# Altium PCB MAGI's24L01.PcbDoc
Units mil, origin at the board's own origin, x right, y up, seen from the top; angles counter-clockwise.
Board outline 6000 x 4000 mil, 2 copper layers (Top Layer, Bottom Layer); 22 components, 16 nets, 85 pads, 39 vias.
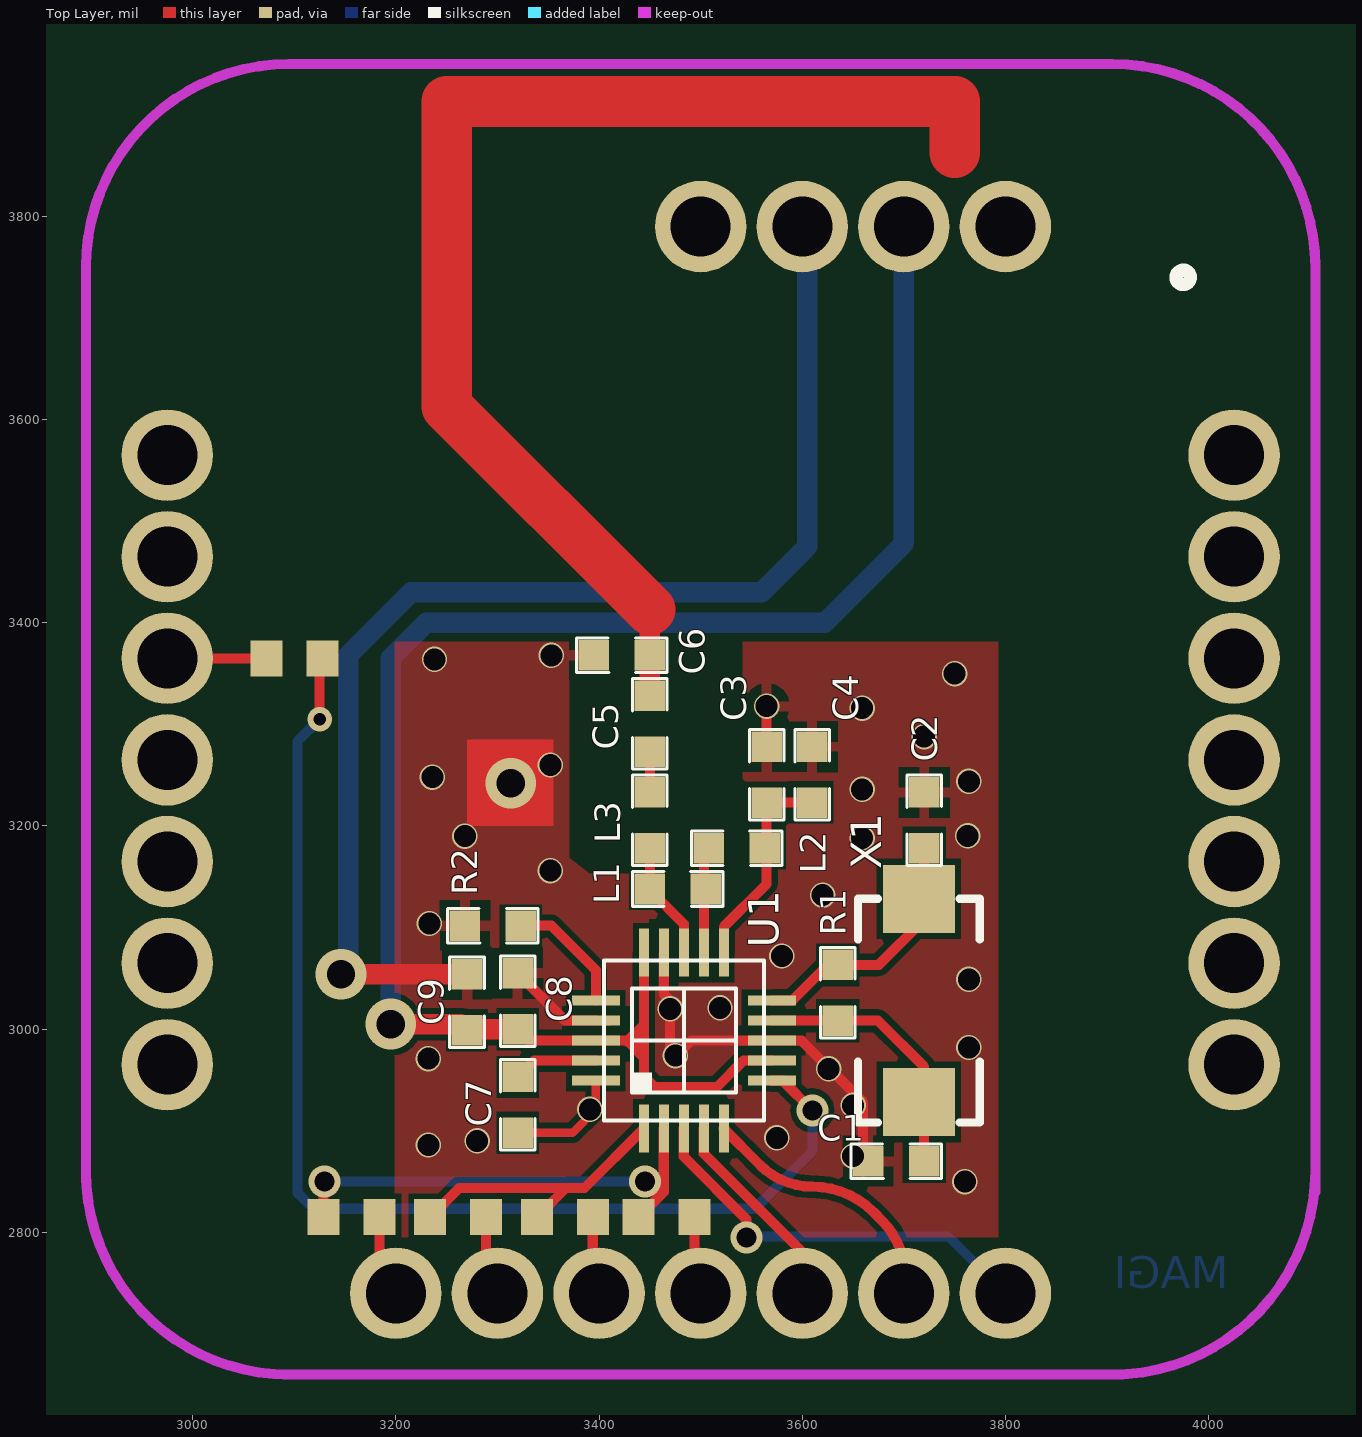
[diagram p0: Top Layer view]
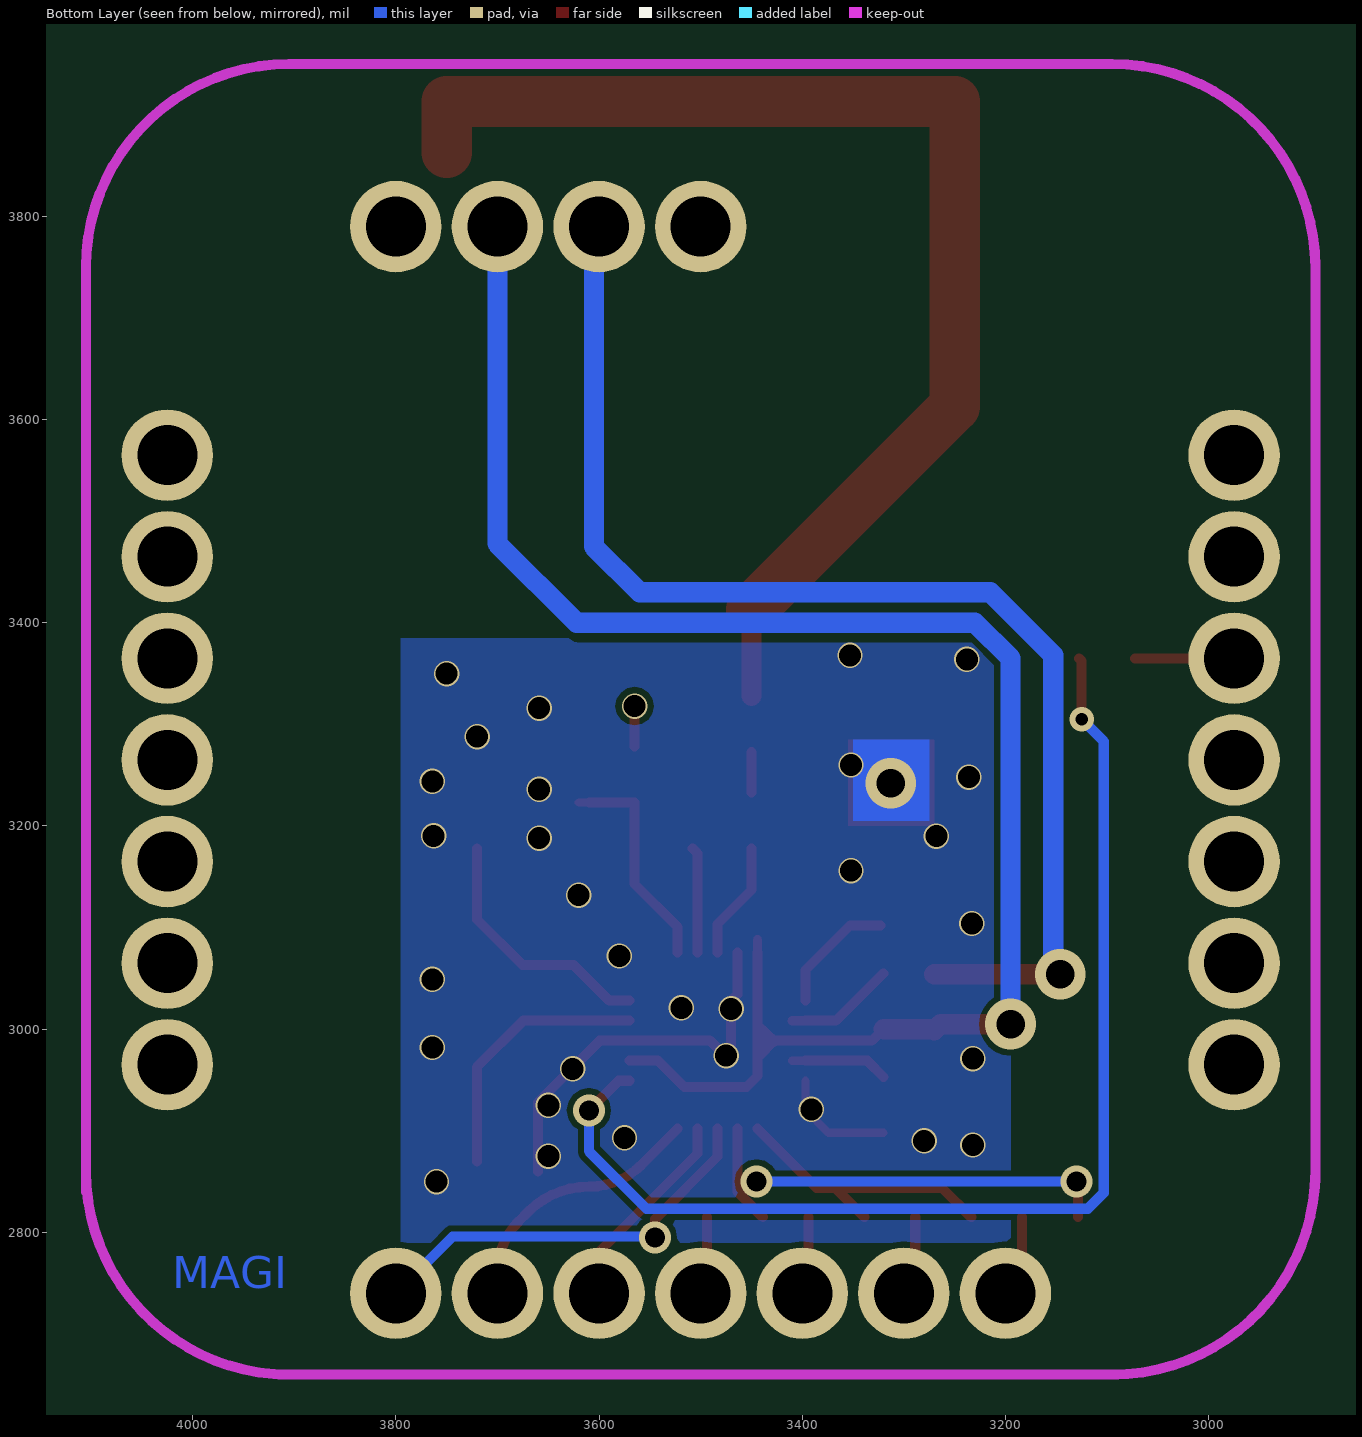
[diagram p1: Bottom Layer view, seen from below]

## Layer stack, top to bottom
Top Solder: solder mask 0.4, Solder Resist, Dk 3.5
Top Layer: signal copper 1.4
Dielectric 1: dielectric 12.6, FR-4, Dk 4.8
Bottom Layer: signal copper 1.4
Bottom Solder: solder mask 0.4, Solder Resist, Dk 3.5

## Board outline
1000,1000 7000,1000 7000,5000 1000,5000

## Design rules (kind name [scope] priority, off if disabled: settings)
Clearance [All] p1: gap=6
PolygonConnect [All] p1: connectstyle=Relief reliefconductorwidth=10 reliefentries=4 polygonreliefangle="90 Angle" airgapwidth=10
RoutingVias [All] p1: holewidth=280 width=500 viastyle="Through Hole" minholewidth=12 minwidth=24 maxholewidth=28 maxwidth=50
SolderMaskExpansion [All] p1: expansion=4
Width [All] p1: maxlimit=100 minlimit=6 preferedwidth=10
29 further rules are at their usual default settings.

## Components (designator, comment, footprint, x,y, rotation, side; value= is the part's Value field where it differs from the comment)
C1 "22pF" 0603 3720,2870 r180 top
C2 "22pF" 0603 3720,3178 r90 top
C3 "2.2nF" 0603 3565,3223 r90 top
C4 "4.7pF" 0603 3610,3223 r90 top
C5 "1.5pF" 0603 3450,3273 r90 top
C6 "1.5pF" 0603 3450,3368 r180 top
C7 "33nF" 0603 3320,2898 r90 top
C8 "1nF" 0603 3320,3000 r90 top
C9 "10nF" 0603 3270,2999 r90 top
L1 "6.8nH" 0603 3450,3138 r0 top
L2 "3.3nH" 0603 3508,3178 r0 top
L3 "3.9nH" 0603 3450,3178 r90 top
R1 "1M" 0603 3635,3008.32 r90 top
R2 "22K" 0603 3323,3102 r180 top
U1 "NRF24L01" nRF24l01 10482.13,-2070.11 r90 top
X1 "Comment" 16M_6532 3674.68,3008.32 r90 top
? "Comment" MAGI-M8 3500,3265 r0 top
? "Comment" 1608[0603] 3100,3365 r0 top
? "Comment" 1608[0603] 3156.3,2815 r0 top
? "Comment" 1608[0603] 3261.3,2815 r0 top
? "Comment" 1608[0603] 3366.3,2815 r0 top
? "Comment" 1608[0603] 3466.3,2815 r0 top

## Footprints (in the part's own frame and the unit in brackets; to place one, negate y for a bottom-side part, rotate by r counter-clockwise, add the part's x,y. Pads: shape width x height; smd on the part's side, far side on the other; paste and mask are expansions set on the pad)
16M_6532 [mil]
  rect 66.93x70.87 smd: 1(-80,-40) 2(120,-40)
  silkscreen extent -100,-100 120,20
0603 [mil]
  rect 30x30 smd: 1(0,0) 2(55,0)
  silkscreen extent -17,-17 72,17
1608[0603] [mm] "Chip Capacitor, Body 1.6x0.8mm, IPC High Density"
  rect 0.8x0.9 smd: 1(-0.7,0) 2(0.7,0)
  body extent -0.87,-0.48 0.87,0.48, height 1.3
MAGI-M8 [mil]
  round 90 hole 59.06: 1(300,525) 2(200,525) 3(100,525) 4(0,525) 8(-525,300) 9(-525,200) 10(-525,100) 11(-525,0) 12(-525,-100) 13(-525,-200) 14(-525,-300) 15(-300,-525) 16(-200,-525) 17(-100,-525) 18(0,-525) 19(100,-525) 20(200,-525) 21(300,-525) 22(525,-300) 23(525,-200) 24(525,-100) 25(525,0) 26(525,100) 27(525,200) 28(525,300)
  Keep-Out Layer lines w10: -605,-415 -605,290 -605,485 cw(c-405,485) -405,685 ; -605,-405 ccw(c-405,-405) -405,-605 ; -410,-605 415,-605 ; 405,-605 ccw(c405,-405) 605,-405 ; 405,685 cw(c405,485) 605,485 605,-425
  silkscreen extent 468,468 482,482
nRF24l01 [mm]
  rect 1.2x0.25 smd: 1(126.292,178.768) 2(126.292,178.268) 3(126.292,177.768) 4(126.292,177.268) 5(126.292,176.768) 11(130.692,176.768) 12(130.692,177.268) 13(130.692,177.768) 14(130.692,178.268) 15(130.692,178.768)
  rect 0.25x1.2 smd: 6(127.492,175.568) 7(127.992,175.568) 8(128.492,175.568) 9(128.992,175.568) 10(129.492,175.568) 16(129.492,179.968) 17(128.992,179.968) 18(128.492,179.968) 19(127.992,179.968) 20(127.492,179.968)
  silkscreen extent 126.49,175.77 130.49,179.77

## Via types
v1: diameter 25, hole 21.65, Top Layer to Bottom Layer, 31 vias
v2: diameter 31.5, hole 19.68, Top Layer to Bottom Layer, 4 vias
v3: diameter 50, hole 28, Top Layer to Bottom Layer, 3 vias
v4: diameter 24, hole 12, Top Layer to Bottom Layer, 1 vias

## Nets (pads, with @x,y where several pads share a name; then routed paths per layer and width w, separated by ;. In a path a pad name is that pad's centre, name@x,y a point inside that pad or via, vN(x,y) a via of type N, cw(c..) or ccw(c..) an arc to the next point about the centre after c; other vN are vias at no path point)
2: ?.1@3072.44,3365 ?.10 | length 97.4
  Top Layer w10: ?.10 ?.1@3072.44,3365
7: ?.2@3183.86,2815 ?.15 | length 81.7
  Top Layer w10: ?.2@3183.86,2815 3183.86,2756.14 ?.15
8: ?.2@3288.86,2815 ?.16 | length 79.6
  Top Layer w10: ?.2@3288.86,2815 3288.86,2751.14 ?.16
9: ?.2@3393.86,2815 ?.17 | length 77.5
  Top Layer w10: ?.2@3393.86,2815 3393.86,2746.14 ?.17
10: ?.2@3493.86,2815 ?.18 | length 77.5
  Top Layer w10: ?.2@3493.86,2815 3493.86,2746.14 ?.18
11: 
12: 
13: 
CE: ?.1@3233.74,2815 ?.1@3338.74,2815 U1.1 | length 286.9
  Top Layer w10: ?.1@3233.74,2815 3262.46,2843.72 3367.46,2843.72 ; ?.1@3338.74,2815 3367.46,2843.72 ; U1.1 3385.72,2843.72 3367.46,2843.72
CSN: ?.1@3128.74,2815 ?.1@3438.74,2815 U1.2 | length 447.9
  Top Layer w10: ?.1@3128.74,2815 3128.74,2848.74 v2(3130,2850) ; ?.1@3438.74,2815 3463.7,2839.96 U1.2
  Bottom Layer w10: v2(3130,2850) v2(3445,2850)
GND: ?.3 C1.2 C2.2 C3.2 C4.2 C6.2 C8.2 C9.2 R2.2 U1.8 U1.14 U1.17 | length 1823.8
  Top Layer w9: U1.17 U1.17@3410,3008.32 ; U1.14@3463.7,3056.54 U1.14
  Top Layer w9.84: C8.2 3366.68,3008.32 U1.17 ; U1.14 3463.7,3034.3 3470,3028 3470,2968 3490.63,2988.63 3599.37,2988.63 3660,2928 C1.2@3660,2860 ; C3.2 v1(3565,3318)
  Top Layer w20: v3(3146,3054) C9.2
  Bottom Layer w20: v3(3146,3054) 3153,3061 3153,3368 3215,3430 3560,3430 3605,3475 3605,3785 ?.3
  other v1: 3760,2850 3650,2875 3232,2886 3280,2890 3575,2893 3391,2921 3650,2925 3626,2961 3232,2971 3475,2974 3764,2982 3470,3020 3519,3021 3764,3049 3580,3072 3233,3104 3620,3132 3352,3156 3659,3188 3268,3190 3762.72,3190.28 3659,3236 3764,3244 3236,3248 3352,3260 3720,3288 3659,3316 3750,3350 3238,3364 3353,3368
  other v3: 3313,3242
IRQ: ?.2@3127.56,3365 U1.6 | length 1165
  Top Layer w10: v4(3125,3305) 3125,3362.44 ?.2@3127.56,3365 ; U1.6 3580.74,2949.26 v2(3610,2920)
  Bottom Layer w10: v4(3125,3305) 3103.25,3283.25 3103.25,2838.92 3118.92,2823.25 3553.25,2823.25 3610,2880 v2(3610,2920)
MISO: ?.20 U1.5 | length 243.8
  Top Layer w10: U1.5 3558.4,2866.37 ccw(c3610,2917.98) 3610,2845 cw(c3610,2760.5) 3669.75,2820.25 3678.79,2811.21 cw(c3627.57,2760) ?.20@3700,2760
MOSI: ?.19 U1.4 | length 202.2
  Top Layer w10: U1.4 3503.07,2877.6 3600,2780.67 ?.19
SCK: ?.21 U1.3 | length 411.1
  Top Layer w10: U1.3 3483.39,2874.66 3545,2813.05 v2(3545,2795)
  Bottom Layer w10: v2(3545,2795) 3546,2796 3744,2796 ?.21
VCC: ?.2@3700,3790 C9.1 | length 1301.3
  Top Layer w20: v3(3195,3005) 3264,3005 C9.1
  Bottom Layer w20: v3(3195,3005) 3195,3365 3230,3400 3622,3400 3700,3478 ?.2@3700,3790
pads on no net: ?.1@3800,3790 ?.4 ?.8 ?.9 ?.11 ?.12 ?.13 ?.14 ?.22 ?.23 ?.24 ?.25 ?.26 ?.27 ?.28 C1.1 C2.1 C3.1 C4.1 C5.1 C5.2 C6.1 C7.1 C7.2 C8.1 L1.1 L1.2 L2.1 L2.2 L3.1 L3.2 R1.1 R1.2 R2.1 U1.7 U1.9 U1.10 U1.11 U1.12 U1.13 U1.15 U1.16 U1.18 U1.19 U1.20 X1.1 X1.2
copper on no net: | length 3101.6
  Top Layer w8: 3320,2898 3374,2898 3396.77,2920.77 3396.77,2949.26 ; 3396.77,2968.95 3410,2968.95 3410,2969 3396.77,2969 ; 3570,3008 3570,3008.32 ; 3590,3028 3625,3063 ; 3610,3223 3620,3223
  Top Layer w9: 3442.65,2988.63 3444.02,2988.63 ; 3444.02,3075.24 3444.02,3088 ; 3570,2968.95 3570,2969
  Top Layer w9.84: 3320,2953 3335.95,2968.95 3396.77,2968.95 ; 3320,3000 3331.37,2988.63 3442.65,2988.63 ; 3323,3102 3353,3102 3396.77,3058.23 3396.77,3028 ; 3444.02,3075.24 3444.02,2953.98 3455,2943 3516.05,2943 3542,2968.95 3570,2968.95 ; 3450,3178 3450,3137 3483.39,3103.61 3483.39,3075.24 ; 3450,3233 3450,3273 ; 3503.07,3075.24 3503.07,3173.07 3508,3178 ; 3522.76,3075.24 3522.76,3100.76 3565,3143 3565,3223 3610,3223 ; 3570,3008.32 3674.68,3008.32 3720,2963 3720,2870 ; 3570,3028 3590,3028 3625.32,3063.32 3675.32,3063.32 3720,3108 3720,3178
  Top Layer w10: 3427.37,2988 3444,3004.02 ; 3428,2988.63 3444.02,2972
  Top Layer w15: 3270,2999 3271,3000
  Top Layer w20: 3271,3000 3320,3000 ; 3450,3328 3450,3403
  Top Layer w50: 3450,3413 3250,3613 3250,3913 3750,3913 3750,3863

## Polygon pours and split planes (outlines as drawn)
GND on Top Layer "TopLayer-No Net" (solid, pour order 2): 3198.74,3381.36 3370.74,3381.36 3370.74,3168.87 3390.74,3152.89 3521.49,3152.89 3537.93,3166.01 3541.49,3168.87 3541.49,3381.36 3792.74,3381.36 3792.74,2795 3198.74,2795
GND on Bottom Layer "Bottom Layer-No Net" (solid, pour order 4): 3795,2790 3795,3385 3195,3385 3195,2790

## Keep-outs
Keep-Out Layer:
  lines w10: 3095,3950 3905,3950

## Other copper
Top Layer:
  rectangle net GND: 3270,3200 3355,3285
Bottom Layer:
  rectangle net GND: 3275,3205 3350,3285

## Text inside footprints (layer, text, board x,y; h text height)
?: Bottom Layer "MAGI" at 4020,2745 h31.5